# Altium PCB sht_rs485.PcbDoc
Units mm, origin at the board's own origin, x right, y up, seen from the top; angles counter-clockwise.
Board outline 38.1 x 39.37 mm, 2 copper layers (Top Layer, Bottom Layer); 52 components, 38 nets, 186 pads, 18 vias.
Unrouted connection lines stored in the file: 15.
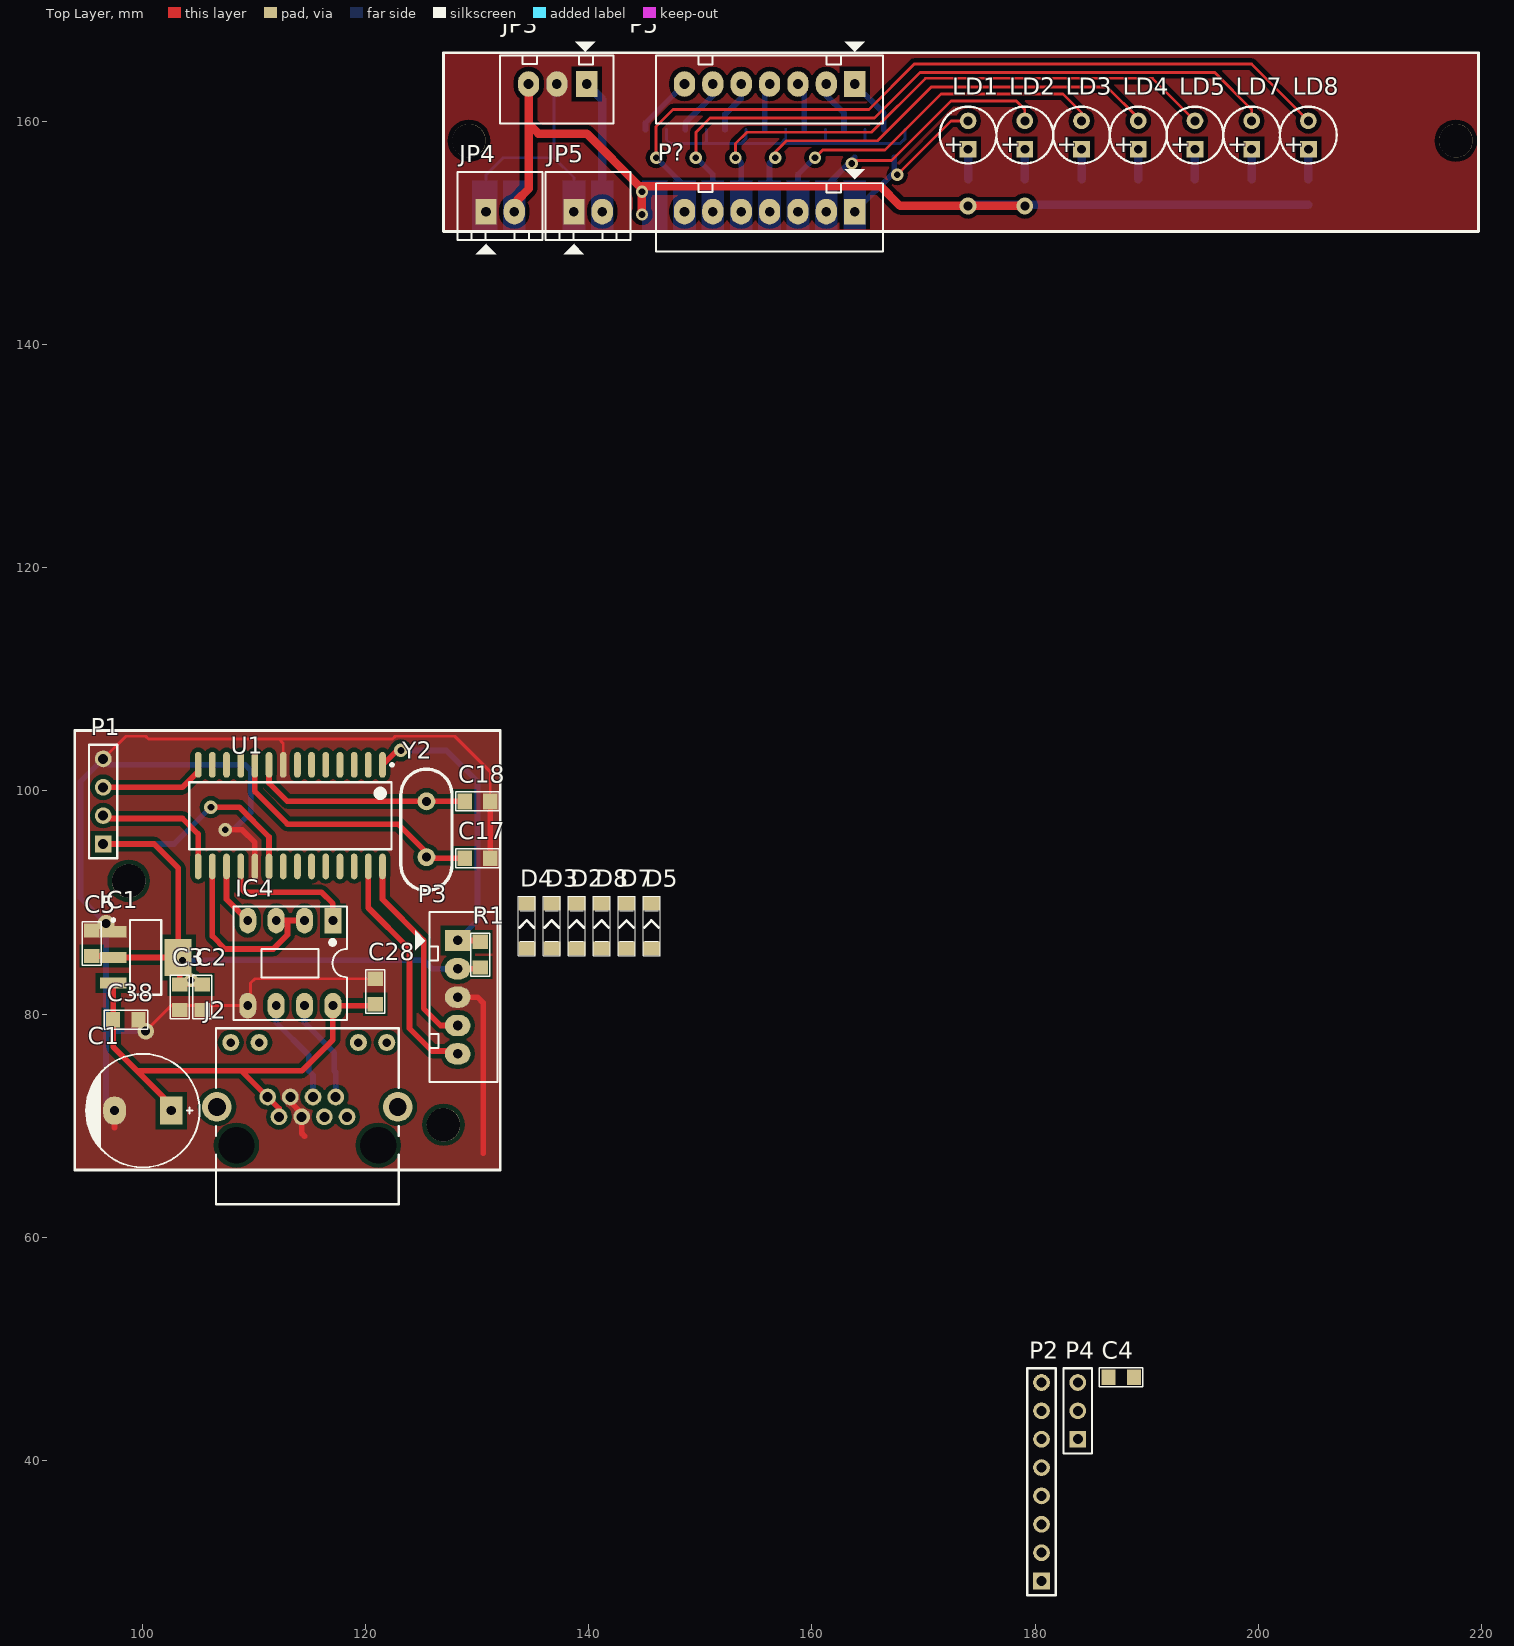
[diagram p0: Top Layer view]
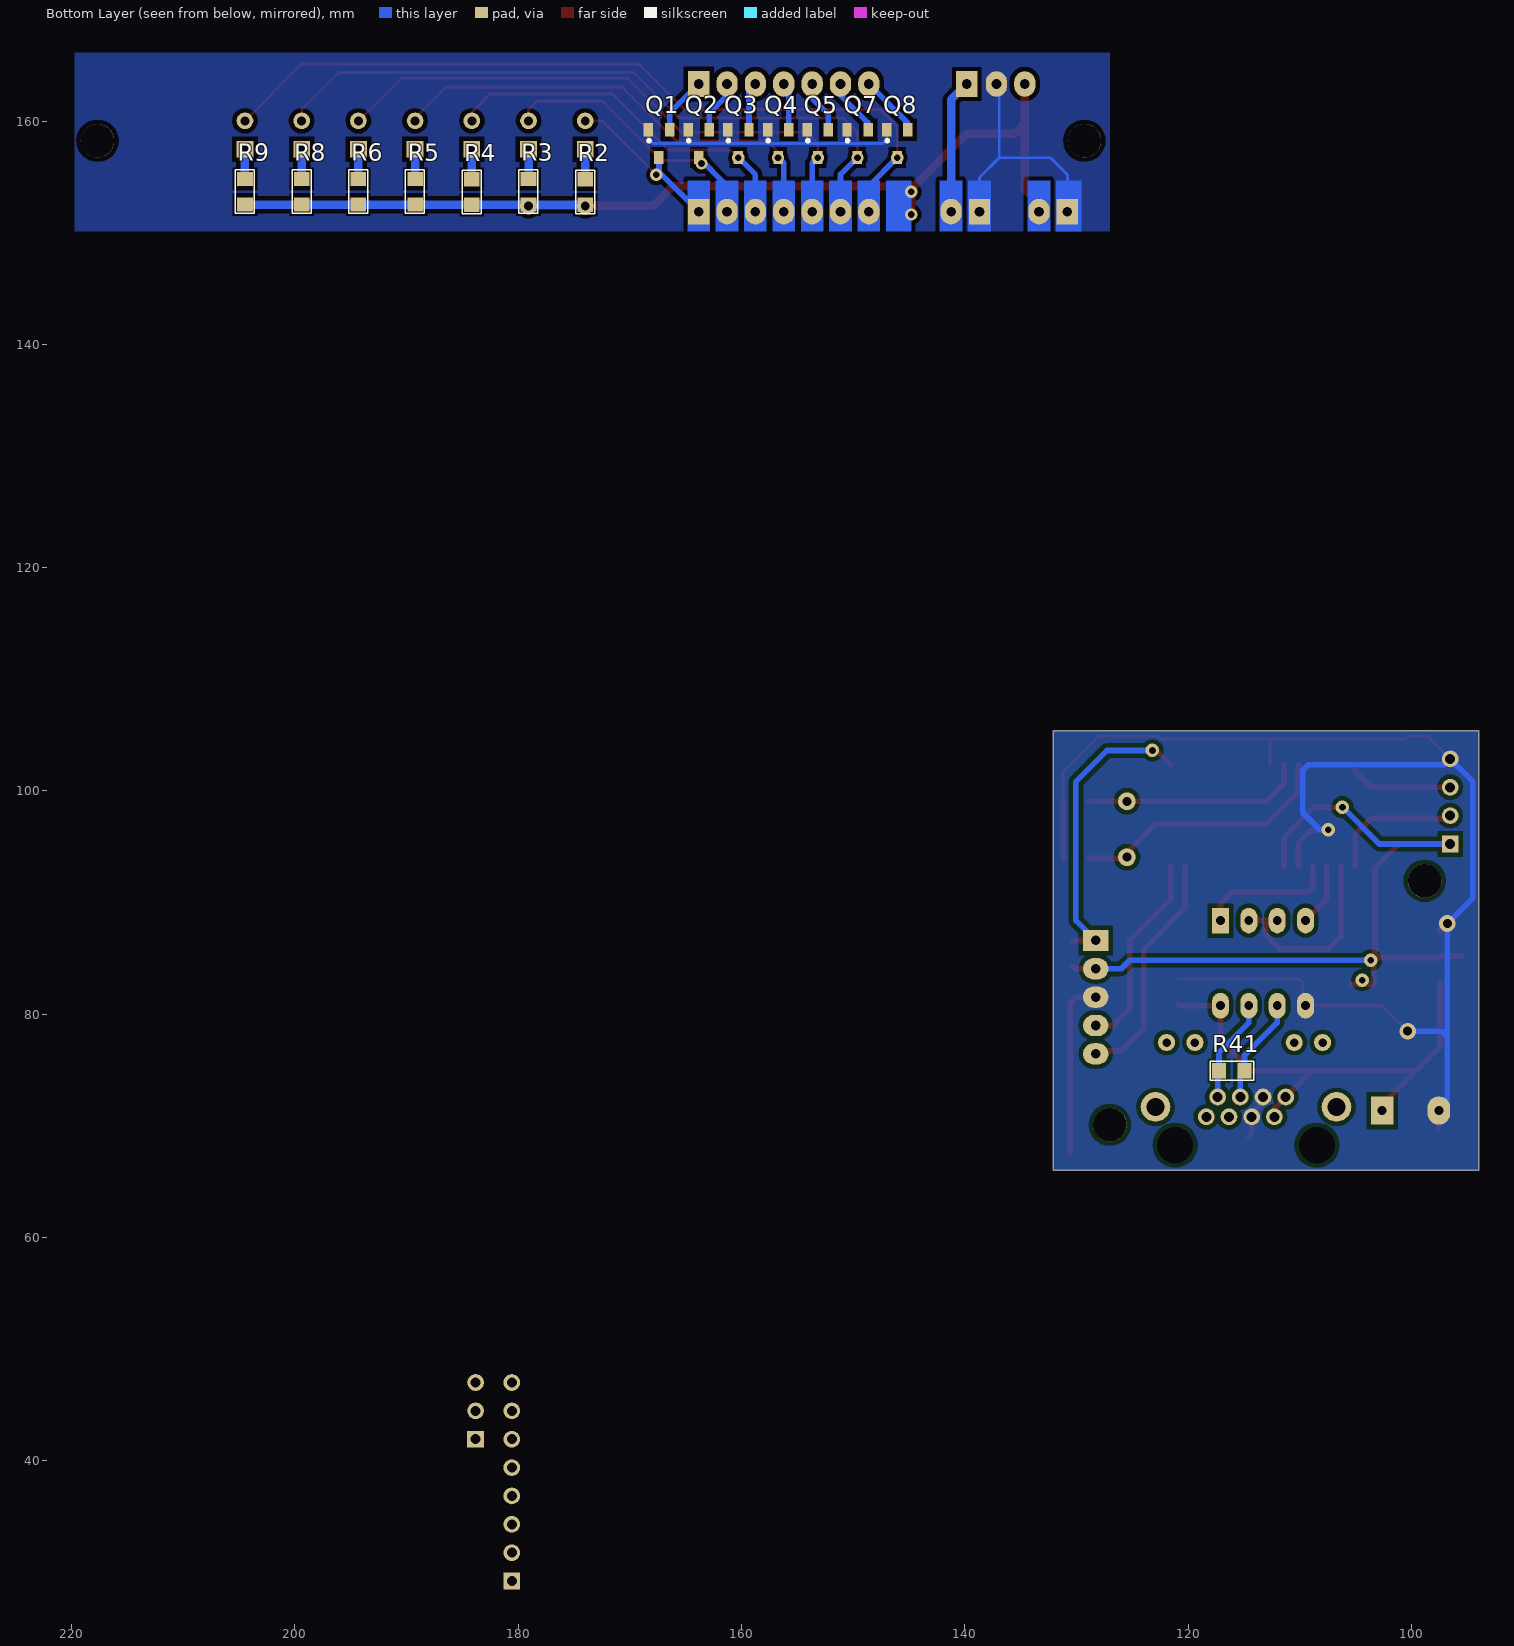
[diagram p1: Bottom Layer view, seen from below]

## Layer stack, top to bottom
Top Layer: signal copper 0.0356
Dielectric: dielectric 0.32, FR-4, Dk 4.8
Bottom Layer: signal copper 0.0356

## Board outline
93.98,66.04 132.08,66.04 132.08,105.41 93.98,105.41

## Design rules (kind name [scope] priority, off if disabled: settings)
Clearance [All] p1: gap=0.381
PlaneConnect [All] p1: planeconnectstyle=Direct reliefexpansion=0.508 reliefentries=4 reliefconductorwidth=0.254 reliefairgap=0.254
PolygonConnect [All] p1: connectstyle=Direct reliefconductorwidth=0.254 reliefentries=4 polygonreliefangle="90 Angle"
RoomDefinition Sheet2 [InComponentClass('Sheet2')] p1: confinementstyle=ConfineIn formatcopy=TRUE lockcomponents=FALSE outline 133.35,67.564 302.768,67.564 302.768,91.186 133.35,91.186
RoomDefinition sht_rs485 [InComponentClass('sht_rs485')] p2: confinementstyle=ConfineIn formatcopy=TRUE lockcomponents=FALSE outline 178.943,26.797 280.035,26.797 280.035,48.895 178.943,48.895
RoutingVias [All] p1: holewidth=0.711 width=1.27 viastyle="Through Hole" minholewidth=0.711 minwidth=1.27 maxholewidth=0.711 maxwidth=1.27
SilkscreenOverComponentPads [All] p1: minsilkscreentomaskgap=0.254
SolderMaskExpansion [All] p1: expansion=0.102
Width [All] p1: maxlimit=2.54 minlimit=0.254 preferedwidth=0.254
26 further rules are at their usual default settings.

## Classes and differential pairs
component class Sheet2: D2 D3 D4 D5 D7 D8 JP3 LD1 LD2 LD3 LD4 LD5 LD7 LD8 P5 P? Q1 Q2 Q3 Q4 Q5 Q7 Q8 R2 R3 R4 R5 R6 R8 R9
component class sht_rs485: C1 C2 C3 C4 C5 C17 C18 C28 C38 IC1 IC4 J2 P1 P2 P3 P4 R1 R41 U1 Y2

## Components (designator, comment, footprint, x,y, rotation, side; value= is the part's Value field where it differs from the comment)
C1 "1000uF/16V" CP2/4 102.616,71.374 r180 top
C2 "104" SM-0805 105.41,81.534 r270 top
C3 "104" SM-0805 103.378,81.534 r270 top
C4 "104" SM-0805 187.712,47.485 r0 top
C5 "104" SM-0805 95.504,86.36 r90 top
C17 "104" SM-0805 130.048,93.98 r180 top
C18 "104" SM-0805 130.048,99.06 r180 top
C28 "104" SM-0805 120.904,82.042 r270 top
C38 "104" SM-0805 98.552,79.502 r180 top
D2 "1N4148" "1n4148 smd" 138.938,87.909 r90 top
D3 "1N4148" "1n4148 smd" 136.703,87.909 r90 top
D4 "1N4148" "1n4148 smd" 134.468,87.909 r90 top
D5 "1N4148" "1n4148 smd" 145.644,87.909 r90 top
D7 "1N4148" "1n4148 smd" 143.408,87.909 r90 top
D8 "1N4148" "1n4148 smd" 141.173,87.909 r90 top
IC1 "LM1117" SOT223-4N 100.33,85.09 r0 top
IC4 "MAX485" DIP8/W0.3 117.094,88.392 r180 top
J2 "RJ45" RJ45 106.68,78.74 r0 top
JP3 "Connector 3" CON3 139.7,163.322 r180 top
JP4 "Connector 3" CON2 130.81,151.892 r0 top (schematic designator JP3)
JP5 "Connector 3" CON2 138.684,151.892 r0 top (schematic designator JP3)
LD1 "LED" LED5mm 173.99,157.48 r90 top
LD2 "LED" LED5mm 179.07,157.48 r90 top
LD3 "LED" LED5mm 184.15,157.48 r90 top
LD4 "LED" LED5mm 189.23,157.48 r90 top
LD5 "LED" LED5mm 194.31,157.48 r90 top
LD7 "LED" LED5mm 199.39,157.48 r90 top
LD8 "LED" LED5mm 204.47,157.48 r90 top
P1 "Header 4" HDR1X4 96.52,95.25 r90 top
P2 "Header 8" HDR1X8 180.567,29.237 r90 top
P3 "Header 5" CON5 128.27,86.614 r270 top
P4 "Header 3" HDR1X3 183.815,41.937 r90 top
P5 "Header" con7 163.83,163.322 r180 top
P? "Header" con7 163.83,151.892 r180 top
Q1 "C1815" SOT23B 167.386,157.988 r0 bottom
Q2 "C1815" SOT23B 163.83,157.988 r0 bottom
Q3 "C1815" SOT23B 160.274,157.988 r0 bottom
Q4 "C1815" SOT23B 156.718,157.988 r0 bottom
Q5 "C1815" SOT23B 153.162,157.988 r0 bottom
Q7 "C1815" SOT23B 149.606,157.988 r0 bottom
Q8 "C1815" SOT23B 146.05,157.988 r0 bottom
R1 "10k" SM-0805 130.302,85.344 r90 top
R2 "2k2" SM-0805 173.99,153.645 r270 bottom
R3 "2k2" SM-0805 179.07,153.67 r270 bottom
R4 "2k2" SM-0805 184.15,153.645 r270 bottom
R5 "2k2" SM-0805 189.23,153.67 r270 bottom
R6 "2k2" SM-0805 194.31,153.67 r270 bottom
R8 "2k2" SM-0805 199.39,153.67 r270 bottom
R9 "2k2" SM-0805 204.47,153.67 r270 bottom
R41 "2k2" SM-0805 116.078,74.93 r0 bottom
U1 "PIC18F26K20-E/SS" SOIC-SO28_N 113.284,97.79 r270 top
Y2 "4MHz" XTAL 125.476,96.52 r270 top

## Footprints (in the part's own frame and the unit in brackets; to place one, negate y for a bottom-side part, rotate by r counter-clockwise, add the part's x,y. Pads: shape width x height; smd on the part's side, far side on the other; paste and mask are expansions set on the pad)
"1n4148 smd" [mil]
  rect 50x60 smd: 1(-80,0) 2(80,0)
  silkscreen extent -105,-30 105,30, body extent -73,-31 73,31
CON2 [mil] "CON2"
  rect 75x90 hole 34: 1(0,0)
  oval 75x90 hole 34: 2(100,0)
  silkscreen extent -100,-150 200,140, body extent -68,-70 168,107, height 236
CON3 [mil] "CON 3"
  rect 75x90 hole 34: 1(-5,0)
  oval 75x90 hole 34: 2(100,0) 3(200,0)
  silkscreen extent -100,-150 300,140, body extent -95,-90 295,136, height 276
CON5 [mil] "CON5"
  rect 75x90 hole 34: 1(0,0)
  oval 75x90 hole 34: 2(100,0) 3(200,0) 4(300,0) 5(400,0)
  silkscreen extent -100,-150 500,140
con7 [mil] "CON7"
  rect 75x90 hole 34: 1(0,0)
  oval 75x90 hole 34: 2(100,0) 3(200,0) 4(300,0) 5(400,0) 6(500,0) 7(600,0)
  silkscreen extent -100,-150 700,140
CP2/4 [mil] "Tu hoa 1000uF/16V/25V"
  rect 80x100 hole 32: 1(0,0)
  oval 80x100 hole 32: 2(200,0)
  silkscreen extent -100,-200 300,200
DIP8/W0.3 [mil] "8 PIN, W 300mil, Pin to pin 100mil"
  rect 60x90 hole 31: 1(0,0)
  oval 60x90 hole 31: 2(100,0) 3(200,0) 4(300,0) 5(300,300) 6(200,300) 7(100,300) 8(0,300)
  silkscreen extent -50,-50 350,350, body extent -50,-40 350,336, height 201
HDR1X3 [mm] "Connector; Header; 3 Position"
  rect 1.5x1.5 hole 0.9: 1(0,0)
  round 1.5 hole 0.9: 2(2.54,0) 3(5.08,0)
  silkscreen extent -1.27,-1.27 6.35,1.27, body extent -1.27,-1.27 6.35,1.27, height 7
HDR1X4 [mm] "Connector; Header; 4 Position"
  rect 1.5x1.5 hole 0.9: 1(0,0)
  round 1.5 hole 0.9: 2(2.54,0) 3(5.08,0) 4(7.62,0)
  silkscreen extent -1.27,-1.27 8.89,1.27, body extent -1.27,-1.27 8.89,1.27, height 7
HDR1X8 [mm] "Connector; Header; 8 Position"
  rect 1.5x1.5 hole 0.9: 1(0,0)
  round 1.5 hole 0.9: 2(2.54,0) 3(5.08,0) 4(7.62,0) 5(10.16,0) 6(12.7,0) 7(15.24,0) 8(17.78,0)
  silkscreen extent -1.27,-1.27 19.05,1.27, body extent -1.27,-1.27 19.05,1.27, height 7
LED5mm [mm]
  rect 1.5x1.5 hole 0.8: 1(0,0)
  round 1.5 hole 0.8: 2(2.54,0)
  silkscreen extent -1.27,-2.54 3.81,2.54
RJ45 [mm] "RJ45 Connector, with LEDs"
  round 1.5 hole 0.9: 1(11.684,-7.928) 2(10.668,-6.15) 3(9.652,-7.928) 4(8.636,-6.15) 5(7.62,-7.928) 6(6.604,-6.15) 7(5.588,-7.928) 8(4.572,-6.15)
  round 1.524 hole 0.762: BLA(3.81,-1.27) BLK(1.27,-1.27) YLA(15.24,-1.27) YLK(12.7,-1.27)
  round 2.65 hole 1.6: MH1(0.025,-7.039) MH2(16.231,-7.039)
  round 2.95 hole 3.25 unplated: MH3(1.778,-10.468) MH4(14.478,-10.468)
  silkscreen extent -0.06,-15.75 16.32,0
SM-0805 [mil] "Compoment SMD 80x50mil"
  rect 50x55 smd: 1(-45,0) 2(45,0)
  silkscreen extent -77,-34 76,33, body extent -42,-25 38,25, height 24
SOIC-SO28_N [mm] "SOIC, 28-Leads, Body 17.9x7.5mm, Pitch 1.27mm, IPC Medium Density"
  oval 2.3x0.6 smd: 1(-4.55,8.255) 2(-4.55,6.985) 3(-4.55,5.715) 4(-4.55,4.445) 5(-4.55,3.175) 6(-4.55,1.905) 7(-4.55,0.635) 8(-4.55,-0.635) 9(-4.55,-1.905) 10(-4.55,-3.175) 11(-4.55,-4.445) 12(-4.55,-5.715) 13(-4.55,-6.985) 14(-4.55,-8.255) 15(4.55,-8.255) 16(4.55,-6.985) 17(4.55,-5.715) 18(4.55,-4.445) 19(4.55,-3.175) 20(4.55,-1.905) 21(4.55,-0.635) 22(4.55,0.635) 23(4.55,1.905) 24(4.55,3.175) 25(4.55,4.445) 26(4.55,5.715) 27(4.55,6.985) 28(4.55,8.255)
  silkscreen extent -4.67,-9.05 3,9.23, body extent -3.8,-9.06 3.8,9.06, height 2.65
SOT23B [mm] "SOT 23B"
  rect 0.85x1.2 smd: 1(0.94,-1.245) 2(0,1.25) 3(-0.95,-1.25)
  silkscreen extent 0.77,-0.38 1.02,-0.13, body extent -1.5,-1.3 1.5,1.2, height 1.06
SOT223-4N [mm] "SOT223, 4-Leads, Body 6.5x3.5mm, Pitch 2.3mm, Lead Span 7mm, IPC Medium Density"
  rect 2.4x1 smd: 1(-2.9,2.3) 2(-2.9,0) 3(-2.9,-2.3)
  rect 2.4x3.3 smd: 4(2.9,0)
  silkscreen extent -3.02,-3.35 1.4,3.47, body extent -3.39,-3.27 3.5,3.23, height 1.72
XTAL [mm]
  round 1.6 hole 0.8: 1(-2.552,0.001) 2(2.448,0.001)
  silkscreen extent -5.44,-2.29 5.44,2.29, body extent -5.55,-2.32 5.62,2.35, height 3.63

## Part data
C1: library part CP4, "Cap 1000uF/16V - 220uF/50V"
C2 C3 C4 C5 C17 C18 C28 C38: library part CM, "Cap SMD"
D2 D3 D4 D5 D7 D8: library part D1A, "Diode 1A"
IC1: "3v3"
IC4: "RS232 - RS485 (Same sn75176)"
J2: "RJ45 Connector, with Leds"
JP3 JP4 JP5: library part CON3
LD1 LD2 LD3 LD4 LD5 LD7 LD8: "LED Single colour Green and Red"
P1: "Header, 4-Pin"
P2: "Header, 8-Pin"
P3: "Header, 5-Pin"
P4: "Header, 3-Pin"
P5 P?: library part "Header 7", "Header, 7-Pin"
Q1 Q2 Q3 Q4 Q5 Q7 Q8: "NPN 600mW, ECB"
R1 R2 R3 R4 R5 R6 R8 R9 R41: library part R, "Resistor 1/4W"
U1: "Flash Microcontroller with 10-Bit A/D and nanoWatt Technology, 64K Flash, 28-Pin SSOP, Extended Temperature Range"
Y2: library part XTAL, "Crystal Oscillator"

## Free pads (board coordinates)
  round 3 hole 3: 0(98.806,91.948) 1(127,70.104) 2(129.286,158.242) 3(217.678,158.242)

## Via types
v1: diameter 1.1, hole 0.6, Top Layer to Bottom Layer, 9 vias
v2: diameter 1.2, hole 0.6, Top Layer to Bottom Layer, 5 vias
v3: diameter 1.5, hole 0.8, Top Layer to Bottom Layer, 4 vias

## Nets (pads, with @x,y where several pads share a name; then routed paths per layer and width w, separated by ;. In a path a pad name is that pad's centre, name@x,y a point inside that pad or via, vN(x,y) a via of type N, cw(c..) or ccw(c..) an arc to the next point about the centre after c; other vN are vias at no path point)
12V: D2.2 D3.2 D4.2 D5.2 D7.2 D8.2 JP3.3 JP4.2 R2.2 R3.2 R4.2 R5.2 R6.2 R8.2 R9.2 | length 91.9
  Top Layer w0.762: JP4.2@133.604,151.892 133.604,152.908 134.62,153.924 134.62,159.766 ; JP3.3 134.62,159.766 ; v1(144.78,151.638) v1(144.78,153.67) ; v3(179.07,152.4) v3(173.99,152.4) 167.894,152.4 166.116,154.178 144.526,154.178 139.827,158.877 135.509,158.877 134.62,159.766
  Bottom Layer w0.762: R2.2 R4.2 R9.2@204.47,152.502
+3.3V: C2.1 C3.1 C4.1 C5.1 IC1.2 IC1.4 P1.1 P3.2 R1.1 U1.20 | length 74.9
  Top Layer w0.508: C5.1 97.303,85.217 IC1.2 IC1.4 ; P1.1 101.092,95.25 103.251,93.091 103.251,85.111 IC1.4 ; C2.1 C3.1 103.378,84.942 IC1.4 ; v2(106.172,98.552) 108.712,98.552 111.379,95.885 U1.20 ; P3.2 130.175,84.074 R1.1
  Bottom Layer w0.508: P1.1 102.87,95.25 v2(106.172,98.552) ; v2(103.632,84.836) 125.222,84.836 125.984,84.074 P3.2
  other v2: 104.394,83.058
+5V: C1.1 C28.2 C38.2 IC1.3 IC4.8 J2.7 J2.8 | length 44.7
  Top Layer w0.508: IC1.3 97.43,77.068 99.568,74.93 ; C1.1 102.616,71.882 99.568,74.93 ; J2.7 112.268,71.574 J2.8 108.912,74.93 ; C28.2 120.777,80.772 IC4.8 117.094,77.724 114.3,74.93 108.912,74.93 ; 99.568,74.93 108.912,74.93
A: IC4.6 J2.4 R41.1 | length 9.5
  Bottom Layer w0.508: IC4.6 112.014,79.248 114.935,76.327 R41.1 115.316,74.549 J2.4
B: IC4.7 J2.2 R41.2 | length 9.3
  Bottom Layer w0.508: IC4.7 114.554,79.248 117.221,76.581 R41.2 117.348,74.803 J2.2
GND: C1.2 C2.2 C3.2 C4.2 C5.2 C17.1 C18.1 C28.1 C38.1 IC1.1 IC4.5 J2.5 J2.6 JP3.2 JP4.1 JP5.1 P1.4 P3.3 Q1.1 Q2.1 Q3.1 Q4.1 Q5.1 Q7.1 Q8.1 U1.8 U1.19 | length 208.1
  Top Layer w0.254: P1.4 98.552,104.902 100.33,104.902 100.584,104.648 112.268,104.648 ; v3(100.33,78.486) 102.616,80.772 IC4.5 109.728,81.026 109.728,82.804 110.109,83.185 C28.1 ; U1.8 112.649,104.267 112.268,104.648 ; C18.1@131.318,99.187 C18.1 131.191,101.727 128.016,104.902 122.682,104.902 122.428,104.648 112.268,104.648
  Top Layer w0.508: IC1.1 IC1.1@97.536,87.496 ; 97.536,69.85 C1.2 ; v2(107.442,96.52) 108.966,96.52 110.109,95.377 U1.19 ; J2.6 113.284,72.136 114.3,71.12 J2.5 114.3,69.342 114.554,69.088 ; P3.3 130.048,81.534 130.556,81.026 130.556,67.564 ; C17.1 C18.1
  Bottom Layer w0.254: JP4.1 130.81,155.194 132.334,156.718 136.906,156.718 ; JP3.2 136.906,163.068 136.906,156.718 ; JP5.1 138.684,154.94 136.906,156.718 ; Q8.1 146.99,158.318 147.32,157.988 150.368,157.988 ; Q7.1 150.546,158.166 150.368,157.988 ; Q5.1 154.102,158.42 153.67,157.988 ; Q4.1 157.658,158.42 157.226,157.988 ; Q3.1 161.214,158.064 161.29,157.988 ; Q2.1 164.77,158.166 164.592,157.988 ; Q1.1 168.326,158.42 167.894,157.988 164.592,157.988 ; 150.368,157.988 153.67,157.988 ; 153.67,157.988 157.226,157.988 ; 157.226,157.988 161.29,157.988 ; 161.29,157.988 164.592,157.988
  Bottom Layer w0.508: C1.2 96.774,72.136 96.774,77.978 ; v3(100.33,78.486) 97.282,78.486 96.774,77.978 ; v2(107.442,96.52) 108.204,96.52 109.728,98.044 109.728,101.854 109.22,102.362 97.028,102.362 P1.4 94.488,100.838 94.488,90.424 v3(96.774,88.138) 96.774,77.978
NetLD1_1: LD1.1 R2.1 | length 2.7
  Bottom Layer w0.762: R2.1 LD1.1
NetLD2_1: LD2.1 R3.1 | length 2.7
  Bottom Layer w0.762: R3.1 LD2.1
NetLD3_1: LD3.1 R4.1 | length 2.7
  Bottom Layer w0.762: R4.1 LD3.1
NetLD4_1: LD4.1 R5.1 | length 2.7
  Bottom Layer w0.762: R5.1 LD4.1
NetLD5_1: LD5.1 R6.1 | length 2.7
  Bottom Layer w0.762: R6.1 LD5.1
NetLD7_1: LD7.1 R8.1 | length 2.7
  Bottom Layer w0.762: R8.1@199.39,154.788 LD7.1
NetLD8_1: LD8.1 R9.1 | length 2.7
  Bottom Layer w0.762: R9.1 LD8.1
NetP1_2: P1.2 U1.15 | length 12.1
  Top Layer w0.508: P1.2 96.774,97.536 103.632,97.536 105.029,96.139 U1.15
NetP1_3: P1.3 U1.14 | length 9.7
  Top Layer w0.254: U1.14@105.029,102.235 U1.14
  Top Layer w0.508: P1.3 103.632,100.33 105.029,101.727 U1.14@105.029,102.235
OUT1: LD1.2 P?.1 Q1.2 | length 14.7
  Top Layer w0.254: v1(167.64,155.194) 168.148,155.702 172.466,160.02 LD1.2
  Bottom Layer w0.508: P?.1 167.386,155.448 Q1.2
OUT2: D2.1 LD2.2 P?.2 Q2.2 | length 24.7
  Top Layer w0.254: v1@163.83,156.464 167.132,156.464 172.466,161.798 178.308,161.798 179.07,161.036 LD2.2
  Bottom Layer w0.508: P?.2 161.29,154.198 Q2.2
  other v1: 163.576,156.21
OUT3: D3.1 LD3.2 P?.3 Q3.2 | length 33.2
  Top Layer w0.254: v1(160.274,156.718) 160.968,157.412 166.556,157.412 171.577,162.433 182.499,162.433 184.15,160.782 LD3.2
  Bottom Layer w0.508: P?.3 158.75,155.214 Q3.2
OUT4: D4.1 LD4.2 P?.4 Q4.2 | length 41.9
  Top Layer w0.254: v1(156.718,156.718) 156.718,157.226 157.734,158.242 165.862,158.242 170.688,163.068 186.436,163.068 189.23,160.274 LD4.2
  Bottom Layer w0.508: P?.4 156.21,156.23 Q4.2
OUT5: D5.1 LD5.2 P?.5 Q5.2 | length 51.5
  Top Layer w0.254: v1(153.162,156.718) 153.162,157.988 154.178,159.004 165.354,159.004 170.18,163.83 190.5,163.83 LD5.2
  Bottom Layer w0.508: Q5.2 153.67,156.23 P?.5
OUT6: D7.1 LD7.2 P?.6 Q7.2 | length 62.1
  Top Layer w0.254: v1(149.606,156.718) 149.606,159.004 150.876,160.274 165.608,160.274 169.672,164.338 196.088,164.338 199.39,161.036 LD7.2
  Bottom Layer w0.508: Q7.2 151.13,155.214 P?.6
OUT7: D8.1 LD8.2 P?.7 Q8.2 | length 71.5
  Top Layer w0.254: v1(146.05,156.718) 146.05,159.512 147.574,161.036 165.1,161.036 169.164,165.1 199.39,165.1 LD8.2
  Bottom Layer w0.508: Q8.2 148.59,154.198 P?.7
PGC: P3.5 U1.27 | length 22.3
  Top Layer w0.254: P3.5@127.254,76.454 P3.5
  Top Layer w0.508: U1.27 120.269,89.535 123.952,85.852 123.952,78.74 125.984,76.708 128.016,76.708 P3.5
PGD: P3.4 U1.28 | length 17.9
  Top Layer w0.508: U1.28 121.539,90.297 125.222,86.614 125.222,80.518 126.746,78.994 P3.4
RESET: P3.1 R1.2 U1.1 | length 27.2
  Top Layer w0.508: U1.1 122.831,103.632 v2(123.19,103.632) ; P3.1 130.175,86.614 R1.2
  Bottom Layer w0.508: v2(123.19,103.632) 127.254,103.632 130.048,100.838 130.048,88.392 P3.1
RL1: P5.1 Q1.3 | length 5.2
  Bottom Layer w0.508: P5.1 166.436,160.716 Q1.3
RL2: P5.2 Q2.3 | length 4.7
  Bottom Layer w0.508: P5.2 161.29,162.306 162.88,160.716 Q2.3
RL3: P5.3 Q3.3 | length 4.3
  Bottom Layer w0.508: P5.3 159.324,162.748 Q3.3
RL4: P5.4 Q4.3 | length 4.3
  Bottom Layer w0.508: Q4.3 155.768,162.88 P5.4
RL5: P5.5 Q5.3 | length 4.7
  Bottom Layer w0.508: Q5.3 152.212,160.594 153.67,162.052 P5.5
RL6: P5.6 Q7.3 | length 5.1
  Bottom Layer w0.508: Q7.3 148.656,159.832 151.13,162.306 P5.6
RL7: P5.7 Q8.3 | length 5.5
  Bottom Layer w0.508: Q8.3 145.1,159.832 P5.7
RS485: IC4.2 IC4.3 U1.16 | length 17.8
  Top Layer w0.508: U1.16 106.299,86.995 107.442,85.852 111.76,85.852 113.03,87.122 113.03,88.392 ; IC4.3 113.03,88.392 ; IC4.2 113.03,88.392
RX_485: IC4.4 U1.17 | length 6.7
  Top Layer w0.254: IC4.4 IC4.4@109.474,89.408
  Top Layer w0.508: U1.17 107.569,90.297 IC4.4
TX_485: IC4.1 U1.18 | length 12.3
  Top Layer w0.254: IC4.1 IC4.1@117.094,89.154
  Top Layer w0.508: U1.18 108.839,91.313 109.22,90.932 116.078,90.932 117.094,89.916 IC4.1@117.094,89.154
V_Z: JP3.1 JP5.2 | length 11.8
  Bottom Layer w0.762: JP3.1 141.224,161.925 JP5.2@141.224,152.146
X1: C17.2 U1.10 Y2.2 | length 24
  Top Layer w0.508: U1.10 110.109,99.949 113.03,97.028 122.936,97.028 125.477,94.487 Y2.2 ; Y2.2@125.314,93.98 C17.2
X2: C18.2 U1.9 Y2.1 | length 19.6
  Top Layer w0.508: U1.9 111.379,100.711 113.018,99.072 Y2.1@125.223,99.072 ; Y2.1 128.893,99.072 C18.2
pads on no net: J2.1 J2.3 J2.BLA J2.BLK J2.MH1 J2.MH2 J2.MH3 J2.MH4 J2.YLA J2.YLK P2.1 P2.2 P2.3 P2.4 P2.5 P2.6 P2.7 P2.8 P4.1 P4.2 P4.3 U1.2 U1.3 U1.4 U1.5 U1.6 U1.7 U1.11 U1.12 U1.13 U1.21 U1.22 U1.23 U1.24 U1.25 U1.26

## Polygon pours and split planes (outlines as drawn)
GND on Top Layer "Bottom Layer-No Net" (solid, pour order 6): 127,150.114 219.71,150.114 219.71,166.116 127,166.116
GND on Top Layer "Bottom Layer-No Net" (solid, pour order 2): 93.98,105.41 132.08,105.41 132.08,66.294 132.08,66.04 93.98,66.04
GND on Bottom Layer "Bottom Layer-No Net" (solid, pour order 8): 127,166.116 219.71,166.116 219.71,150.114 127,150.114
GND on Bottom Layer "Bottom Layer-No Net" (solid, pour order 4): 93.98,105.41 132.08,105.41 132.08,66.04 93.98,66.04

## Other copper
Bottom Layer:
  rectangle net V_Z: 140.208,150.114 142.24,154.686
  rectangle net GND: 137.668,150.114 139.7,154.686
  rectangle net 12V: 132.334,150.114 134.366,154.686
  rectangle net GND: 129.54,150.114 131.826,154.686
  rectangle net 12V: 144.78,150.114 147.066,154.686
  rectangle net OUT1: 162.814,150.114 164.846,154.686
  rectangle net OUT2: 160.274,150.114 162.306,154.686
  rectangle net OUT3: 157.734,150.114 159.766,154.686
  rectangle net OUT4: 155.194,150.114 157.226,154.686
  rectangle net OUT5: 152.654,150.114 154.686,154.686
  rectangle net OUT6: 150.114,150.114 152.146,154.686
  rectangle net OUT7: 147.574,150.114 149.606,154.686

## Silkscreen, mask and mechanical layers (free items; w line width, h text height)
Top Overlay:
  lines w0.254: 93.98,66.04 93.98,105.41 132.08,105.41 132.08,66.294 132.08,66.04 93.98,66.04 ; 127,150.114 127,166.116 219.71,166.116 219.71,150.114 127,150.114
Bottom Solder:
  rectangle: 140.208,150.114 142.24,154.686
  rectangle: 137.668,150.114 139.7,154.686
  rectangle: 132.334,150.114 134.366,154.686
  rectangle: 129.54,149.86 131.826,154.686
  rectangle: 144.78,150.114 147.066,154.686
  rectangle: 162.814,150.114 164.846,154.686
  rectangle: 160.274,150.114 162.306,154.686
  rectangle: 157.734,150.114 159.766,154.686
  rectangle: 155.194,150.114 157.226,154.686
  rectangle: 152.654,150.114 154.686,154.686
  rectangle: 150.114,150.114 152.146,154.686
  rectangle: 147.574,150.114 149.606,154.686

## Text inside footprints (layer, text, board x,y; h text height)
LD1: Top Overlay "+" at 173.355,156.972 h1.52 r90
LD2: Top Overlay "+" at 178.435,156.972 h1.52 r90
LD3: Top Overlay "+" at 183.515,156.972 h1.52 r90
LD4: Top Overlay "+" at 188.595,156.972 h1.52 r90
LD5: Top Overlay "+" at 193.675,156.972 h1.52 r90
LD7: Top Overlay "+" at 198.755,156.972 h1.52 r90
LD8: Top Overlay "+" at 203.835,156.972 h1.52 r90